# Altium PCB optopara_rro.PcbDoc
Units mm, origin at the board's own origin, x right, y up, seen from the top; angles counter-clockwise.
Board outline 71.5 x 27.85 mm, 2 copper layers (Top Layer, Bottom Layer); 50 components, 26 nets, 92 pads, 0 vias.
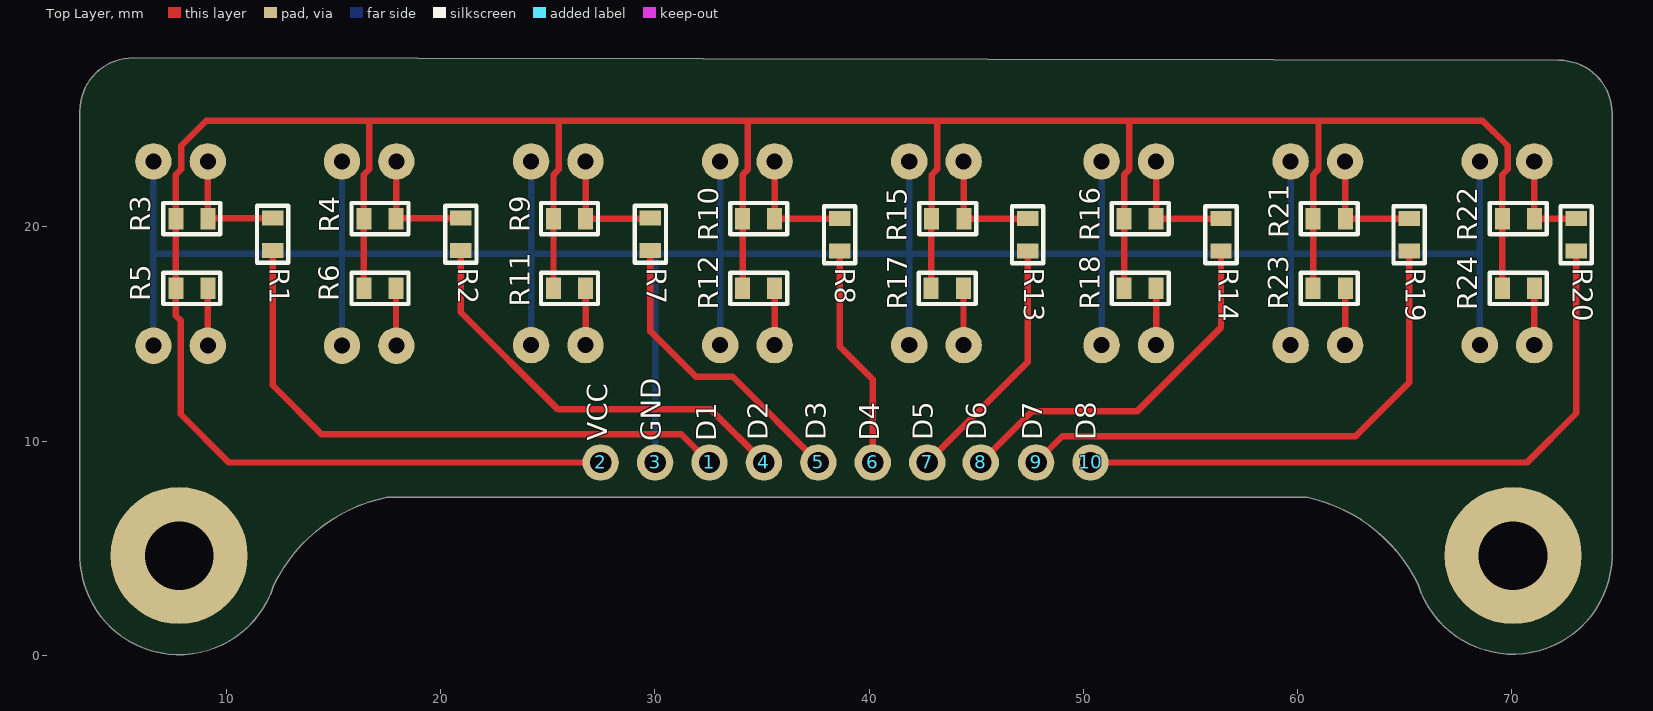
[diagram p0: Top Layer view]
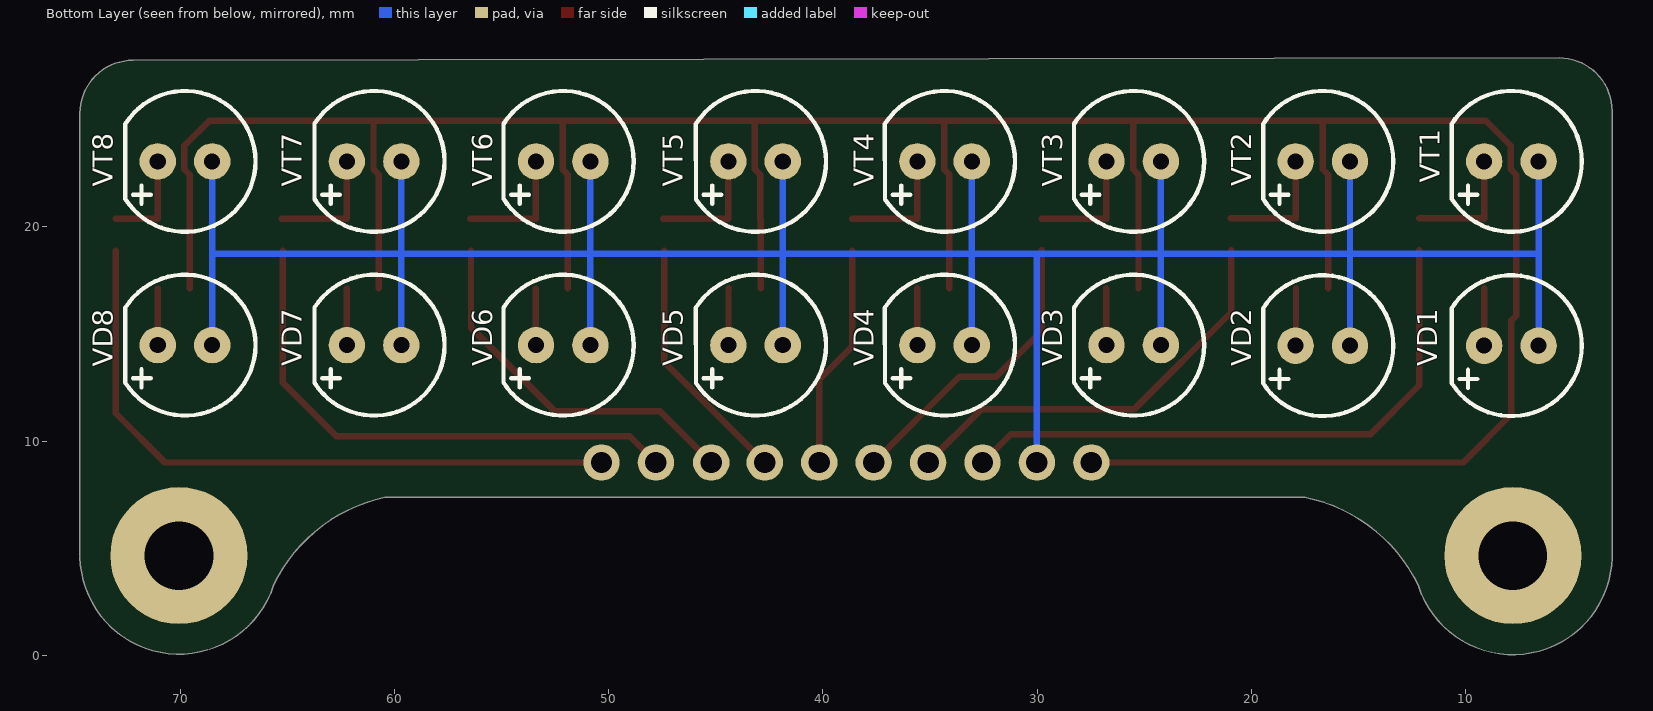
[diagram p1: Bottom Layer view, seen from below]
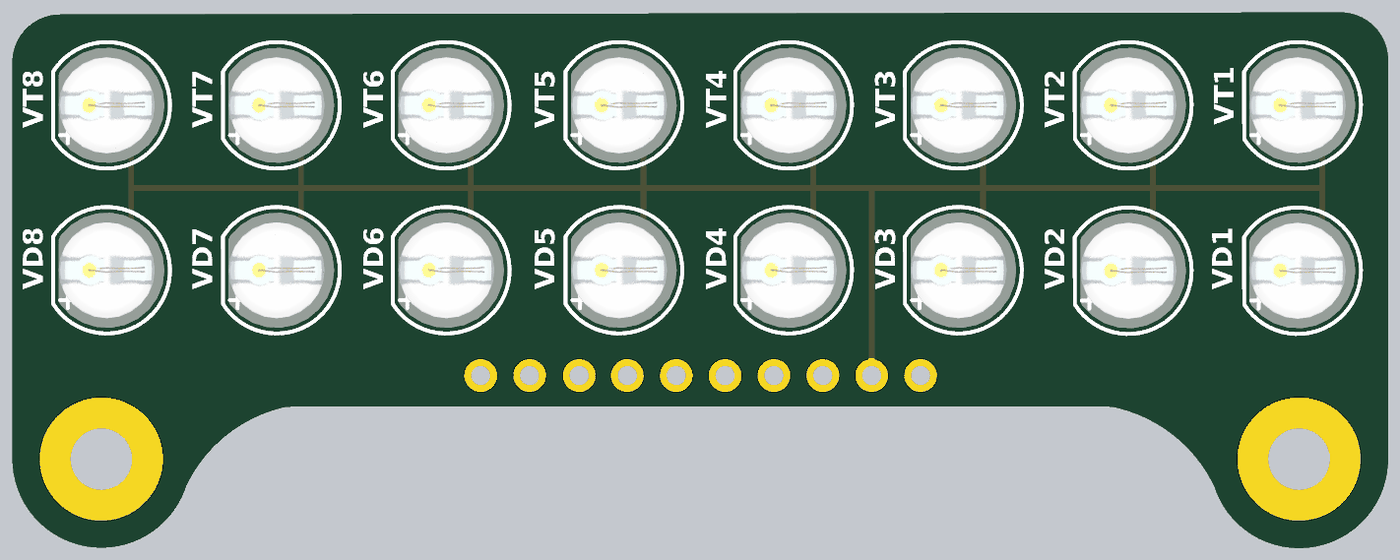
[diagram p2: 3D render of the assembled board from below, using the file's embedded part models]

## Layer stack, top to bottom
Top Solder: solder mask 0.0102, Solder Resist, Dk 3.5
Top Layer: signal copper 0.0356
Dielectric 1: dielectric 0.32, FR-4, Dk 4.8
Bottom Layer: signal copper 0.0356
Bottom Solder: solder mask 0.0102, Solder Resist, Dk 3.5

## Board outline
3.181,4.562 ccw(c7.805,4.655) 12.201,3.217 12.204,3.227 cw(c19,0) 17.512,7.375 60.425,7.375 60.447,7.377 cw(c58.85,0.025) 65.646,3.252 65.649,3.242 ccw(c70.045,4.68) 74.669,4.587 74.675,4.625 74.675,25.285 ccw(c72.187,25.282) 72.186,27.771 5.654,27.881 5.653,27.881 ccw(c5.656,25.4) 3.175,25.399

## Design rules (kind name [scope] priority, off if disabled: settings)
AcuteAngle min_acute_angle [OnCopper] p1: minimum=3.50000000000000E+0001 checktracksonly=FALSE // Минимальный угол между примитивами топологии
BoardOutlineClearance board_outline_clearance_std [NOT (OnLayer('Bottom Overlay') OR OnLayer('Top Overlay'))] p1: gap=0.25 ignorepadtopadclearanceinfootprint=FALSE except(0: Arc-SplitContinuation Track-SplitContinuation SMDPad-SplitContinuation THPad-SplitContinuation Via-SplitContinuation Fill-SplitContinuation Poly-SplitContinuation Region-SplitContinuation Text-SplitContinuation) // Отступ элементов топологии от края фрезеруемой печатной платы
Clearance clearance_outer_35um_std [OnTopLayer OR OnBottomLayer] p1: gap=0.2 ignorepadtopadclearanceinfootprint=TRUE except(0.25: Arc-Hole Track-Hole SMDPad-Hole THPad-Hole Via-Hole Fill-Hole Poly-Hole Region-Hole Text-Hole) // Зазоры на внешних слоях
Clearance clearance_inner_35um_std [NOT (OnTopLayer Or OnBottomLayer)] p2: gap=0.2 ignorepadtopadclearanceinfootprint=FALSE except(0.25: Arc-Hole Track-Hole SMDPad-Hole THPad-Hole Via-Hole Fill-Hole Poly-Hole Region-Hole Text-Hole) // Зазоры на внутренних слоях
ComponentClearance [All] p1: gap=0 collisioncheckmode=3 verticalgap=0 showdistances=FALSE
DiffPairsRouting diff_pairs_routing [All] p1: maxlimit=0.127 minlimit=0.127 mostfreqgap=0.127 toplayer_minwidth=0.143 toplayer_maxwidth=0.143 toplayer_prefwidth=0.143 bottomlayer_minwidth=0.143 bottomlayer_maxwidth=0.143 bottomlayer_prefwidth=0.143 impedanceprofiledriven=TRUE impedanceprofileid={FD46899E-B5A2-4EF5-A302-5D2DB6A51F35} maxuncoupledlength=12.7 // Правила трассировки дифференциальных пар
HoleSize min_hole_size_std [IsPad] p1: absolutevalues=TRUE maxlimit=5.9 minlimit=0.6 maxpercent=80.000 minpercent=20.000 // Диаметр межслойного переходного отверстия
HoleSize min_hole_size_via_std [IsVia] p2: absolutevalues=TRUE maxlimit=5.9 minlimit=0.3 maxpercent=80.000 minpercent=20.000 // Минимальный диаметр монтажного отверстия
HoleToHoleClearance hole_to_hole_clearance_std [All] p1: gap=0.2 allowstackedmicrovias=FALSE // Минимальное расстояние между краями двух отверстий
MinimumAnnularRing min_via_ar_std [All] p1: minimumring=0.15 // Поясок площадки переходного отверстия (Annular ring VIA)
MinimumAnnularRing min_pad_ar_std [All] p2: minimumring=0.2 // Поясок монтажной контактной площадки (Annular ring PAD)
MinimumSolderMaskSliver min_solder_mask_bridge_std [All] p1: minsoldermaskwidth=0.15 // Мнимальная ширина масочного мостика
PlaneClearance plane_clearance_35um_std [All] p1: clearance=0.2 // Отступ полигона (для слоя plane) от элементов топологии
PlaneConnect [All] p1: planeconnectstyle=Relief reliefexpansion=0.5 reliefentries=4 reliefconductorwidth=0.2 reliefairgap=0.2
PolygonConnect poly_connect_to_pad<=0.3 [(AsMM(PadXSize_AllLayers)<=0.301) or (AsMM(PadYSize_AllLayers)<=0.301)] p1: thpad.connectstyle=Relief thpad.reliefconductorwidth=0.2 thpad.reliefentries=4 thpad.polygonreliefangle="90 Angle" thpad.airgapwidth=0.2 smdpad.connectstyle=Relief smdpad.reliefconductorwidth=0.2 smdpad.reliefentries=4 smdpad.polygonreliefangle="90 Angle" smdpad.airgapwidth=0.2 via.connectstyle=Direct via.reliefconductorwidth=0.254 via.reliefentries=4 via.polygonreliefangle="90 Angle" via.airgapwidth=0.254 // Правила подключения полигонов для падов от 0,3мм и меньше
PolygonConnect poly_connect_to_pad<=0.4 [(AsMM(PadXSize_AllLayers)<=0.401) or (AsMM(PadYSize_AllLayers)<=0.401)] p2: thpad.connectstyle=Relief thpad.reliefconductorwidth=0.26 thpad.reliefentries=4 thpad.polygonreliefangle="90 Angle" thpad.airgapwidth=0.2 smdpad.connectstyle=Relief smdpad.reliefconductorwidth=0.26 smdpad.reliefentries=4 smdpad.polygonreliefangle="90 Angle" smdpad.airgapwidth=0.2 via.connectstyle=Direct via.reliefconductorwidth=0.254 via.reliefentries=4 via.polygonreliefangle="90 Angle" via.airgapwidth=0.254 // Правила подключения полигонов для падов от 0,4 и меньше
PolygonConnect poly_connect_to_pad<=0.6 [(AsMM(PadXSize_AllLayers)<=0.601) or (AsMM(PadYSize_AllLayers)<=0.601)] p3: thpad.connectstyle=Relief thpad.reliefconductorwidth=0.33 thpad.reliefentries=4 thpad.polygonreliefangle="90 Angle" thpad.airgapwidth=0.2 smdpad.connectstyle=Relief smdpad.reliefconductorwidth=0.33 smdpad.reliefentries=4 smdpad.polygonreliefangle="90 Angle" smdpad.airgapwidth=0.2 via.connectstyle=Direct via.reliefconductorwidth=0.254 via.reliefentries=4 via.polygonreliefangle="90 Angle" via.airgapwidth=0.254 // Правила подключения полигонов для падов от 0,6мм и меньше
PolygonConnect poly_connect_to_pad<=0.7 [(AsMM(PadXSize_AllLayers)<=0.701) or (AsMM(PadYSize_AllLayers)<=0.701)] p4: thpad.connectstyle=Relief thpad.reliefconductorwidth=0.46 thpad.reliefentries=4 thpad.polygonreliefangle="90 Angle" thpad.airgapwidth=0.2 smdpad.connectstyle=Relief smdpad.reliefconductorwidth=0.46 smdpad.reliefentries=4 smdpad.polygonreliefangle="90 Angle" smdpad.airgapwidth=0.2 via.connectstyle=Direct via.reliefconductorwidth=0.254 via.reliefentries=4 via.polygonreliefangle="90 Angle" via.airgapwidth=0.254 // Правила подключения полигонов для падов от 0,7мм и меньше
PolygonConnect poly_connect_to_pad<=0.8 [(AsMM(PadXSize_AllLayers)<=0.8)or(AsMM(PadYSize_AllLayers)<=0.8)] p5: thpad.connectstyle=Relief thpad.reliefconductorwidth=0.53 thpad.reliefentries=4 thpad.polygonreliefangle="90 Angle" thpad.airgapwidth=0.3 smdpad.connectstyle=Relief smdpad.reliefconductorwidth=0.53 smdpad.reliefentries=4 smdpad.polygonreliefangle="90 Angle" smdpad.airgapwidth=0.2 via.connectstyle=Direct via.reliefconductorwidth=0.254 via.reliefentries=4 via.polygonreliefangle="90 Angle" via.airgapwidth=0.254 // Правила подключения полигонов для падов от 0,8мм и меньше
PolygonConnect poly_connect_to_pad<=1 [(AsMM(PadXSize_AllLayers)<=1.01)or(AsMM(PadYSize_AllLayers)<=1.01)] p6: thpad.connectstyle=Relief thpad.reliefconductorwidth=0.6 thpad.reliefentries=4 thpad.polygonreliefangle="90 Angle" thpad.airgapwidth=0.3 smdpad.connectstyle=Relief smdpad.reliefconductorwidth=0.6 smdpad.reliefentries=4 smdpad.polygonreliefangle="90 Angle" smdpad.airgapwidth=0.2 via.connectstyle=Direct via.reliefconductorwidth=0.254 via.reliefentries=4 via.polygonreliefangle="90 Angle" via.airgapwidth=0.254 // Правила подключения полигонов для падов от 1мм и меньше
PolygonConnect poly_connect_to_pad<=1.3 [(AsMM(PadXSize_AllLayers)<=1.31)or(AsMM(PadYSize_AllLayers)<=1.31)] p7: thpad.connectstyle=Relief thpad.reliefconductorwidth=0.66 thpad.reliefentries=4 thpad.polygonreliefangle="90 Angle" thpad.airgapwidth=0.3 smdpad.connectstyle=Relief smdpad.reliefconductorwidth=0.86 smdpad.reliefentries=4 smdpad.polygonreliefangle="90 Angle" smdpad.airgapwidth=0.2 via.connectstyle=Direct via.reliefconductorwidth=0.254 via.reliefentries=4 via.polygonreliefangle="90 Angle" via.airgapwidth=0.254 // Правила подключения полигонов для падов от 1,3мм и меньше
PolygonConnect poly_connect_to_pad<=1.6 [(AsMM(PadXSize_AllLayers)<=1.61)or(AsMM(PadYSize_AllLayers)<=1.61)] p8: thpad.connectstyle=Relief thpad.reliefconductorwidth=0.8 thpad.reliefentries=4 thpad.polygonreliefangle="90 Angle" thpad.airgapwidth=0.3 smdpad.connectstyle=Relief smdpad.reliefconductorwidth=1 smdpad.reliefentries=4 smdpad.polygonreliefangle="90 Angle" smdpad.airgapwidth=0.2 via.connectstyle=Direct via.reliefconductorwidth=0.254 via.reliefentries=4 via.polygonreliefangle="90 Angle" via.airgapwidth=0.254 // Правила подключения полигонов для падов от 1,6мм и меньше
PolygonConnect poly_connect_to_pad<=1.8 [(AsMM(PadXSize_AllLayers)<=1.8)or(AsMM(PadYSize_AllLayers)<=1.8)] p9: thpad.connectstyle=Relief thpad.reliefconductorwidth=1 thpad.reliefentries=4 thpad.polygonreliefangle="90 Angle" thpad.airgapwidth=0.3 smdpad.connectstyle=Relief smdpad.reliefconductorwidth=1.2 smdpad.reliefentries=4 smdpad.polygonreliefangle="90 Angle" smdpad.airgapwidth=0.2 via.connectstyle=Direct via.reliefconductorwidth=0.254 via.reliefentries=4 via.polygonreliefangle="90 Angle" via.airgapwidth=0.254 // Правила подключения полигонов для падов от 1,8мм и меньше
PolygonConnect poly_connect_to_pad<=2 [(AsMM(PadXSize_AllLayers)<=2.01)or(AsMM(PadYSize_AllLayers)<=2.01)] p10: thpad.connectstyle=Relief thpad.reliefconductorwidth=1.1 thpad.reliefentries=4 thpad.polygonreliefangle="90 Angle" thpad.airgapwidth=0.3 smdpad.connectstyle=Relief smdpad.reliefconductorwidth=1.4 smdpad.reliefentries=4 smdpad.polygonreliefangle="90 Angle" smdpad.airgapwidth=0.2 via.connectstyle=Direct via.reliefconductorwidth=0.254 via.reliefentries=4 via.polygonreliefangle="90 Angle" via.airgapwidth=0.254 // Правила подключения полигонов для падов от 2мм и меньше
PolygonConnect poly_connect_to_pad<=2.3 [(AsMM(PadXSize_AllLayers)<=2.31)or(AsMM(PadYSize_AllLayers)<=2.31)] p11: thpad.connectstyle=Relief thpad.reliefconductorwidth=1.2 thpad.reliefentries=4 thpad.polygonreliefangle="90 Angle" thpad.airgapwidth=0.3 smdpad.connectstyle=Relief smdpad.reliefconductorwidth=1.4 smdpad.reliefentries=4 smdpad.polygonreliefangle="90 Angle" smdpad.airgapwidth=0.2 via.connectstyle=Direct via.reliefconductorwidth=0.254 via.reliefentries=4 via.polygonreliefangle="90 Angle" via.airgapwidth=0.254 // Правила подключения полигонов для падов от 2,3мм и меньше
PolygonConnect poly_connect_to_pad<=2.5 [(AsMM(PadXSize_AllLayers)<=2.51)or(AsMM(PadYSize_AllLayers)<=2.51)] p12: thpad.connectstyle=Relief thpad.reliefconductorwidth=1.2 thpad.reliefentries=4 thpad.polygonreliefangle="90 Angle" thpad.airgapwidth=0.3 smdpad.connectstyle=Relief smdpad.reliefconductorwidth=1.4 smdpad.reliefentries=4 smdpad.polygonreliefangle="90 Angle" smdpad.airgapwidth=0.2 via.connectstyle=Direct via.reliefconductorwidth=0.254 via.reliefentries=4 via.polygonreliefangle="90 Angle" via.airgapwidth=0.254 // Правила подключения полигонов для падов от 2,5мм и меньше
PolygonConnect poly_connect_to_pad<=2.7 [(AsMM(PadXSize_AllLayers)<=2.71)or(AsMM(PadYSize_AllLayers)<=2.71)] p13: thpad.connectstyle=Relief thpad.reliefconductorwidth=1.4 thpad.reliefentries=4 thpad.polygonreliefangle="90 Angle" thpad.airgapwidth=0.3 smdpad.connectstyle=Relief smdpad.reliefconductorwidth=1.6 smdpad.reliefentries=4 smdpad.polygonreliefangle="90 Angle" smdpad.airgapwidth=0.2 via.connectstyle=Direct via.reliefconductorwidth=0.254 via.reliefentries=4 via.polygonreliefangle="90 Angle" via.airgapwidth=0.254 // Правила подключения полигонов для падов от 2,7мм и меньше
PolygonConnect poly_connect_to_pad<=3 [(AsMM(PadXSize_AllLayers)<=3.01)or(AsMM(PadYSize_AllLayers)<=3.01)] p14: thpad.connectstyle=Relief thpad.reliefconductorwidth=1.6 thpad.reliefentries=4 thpad.polygonreliefangle="90 Angle" thpad.airgapwidth=0.3 smdpad.connectstyle=Relief smdpad.reliefconductorwidth=1.8 smdpad.reliefentries=4 smdpad.polygonreliefangle="90 Angle" smdpad.airgapwidth=0.2 via.connectstyle=Direct via.reliefconductorwidth=0.254 via.reliefentries=4 via.polygonreliefangle="90 Angle" via.airgapwidth=0.254 // Правила подключения полигонов для падов от 3мм и меньше
PolygonConnect poly_connect_to_pad<=7 [(AsMM(PadXSize_AllLayers)<7.01)or(AsMM(PadYSize_AllLayers)<=7.01)] p15: thpad.connectstyle=Relief thpad.reliefconductorwidth=2 thpad.reliefentries=4 thpad.polygonreliefangle="90 Angle" thpad.airgapwidth=0.4 smdpad.connectstyle=Relief smdpad.reliefconductorwidth=2 smdpad.reliefentries=4 smdpad.polygonreliefangle="90 Angle" smdpad.airgapwidth=0.3 via.connectstyle=Direct via.reliefconductorwidth=0.254 via.reliefentries=4 via.polygonreliefangle="90 Angle" via.airgapwidth=0.254 // Правила подключения полигонов для падов от 7мм и меньше
PolygonConnect poly_connect_to_pad [All] p16: thpad.connectstyle=Relief thpad.reliefconductorwidth=0.25 thpad.reliefentries=4 thpad.polygonreliefangle="90 Angle" thpad.airgapwidth=0.2 smdpad.connectstyle=Relief smdpad.reliefconductorwidth=0.25 smdpad.reliefentries=4 smdpad.polygonreliefangle="90 Angle" smdpad.airgapwidth=0.2 via.connectstyle=Direct via.reliefconductorwidth=0.25 via.reliefentries=4 via.polygonreliefangle="90 Angle" via.airgapwidth=0.2 // Правила подключения полигонов общие
RoutingCorners [All] p1 off: cornerstyle=45-Degree minsetback=2.5 maxsetback=2.5
RoutingVias [All] p1: holewidth=0.3 width=0.6 viastyle="Through Hole" minholewidth=0.3 minwidth=0.6 maxholewidth=5.9 maxwidth=6.4
SilkToSilkClearance silk_to_silk_clearance_std [All] p1 off: silktosilkclearance=0.15 // Отступ текста шелкографии от других примитивов шелкографии
SilkToSolderMaskClearance silk_to_solder_mask_clearance_std [IsPad] p1 off: minsilkscreentomaskgap=0.15 clearancetoexposedcopper=FALSE // Минимальное расстояние между элементами шелкографии и вскрытой медью
SolderMaskExpansion solder_mask_expansion_std [All] p1: expansion=0.05 istentingtop=FALSE // Припуск паяльной масски
UnRoutedNet [All] p1: checkbadconnections=TRUE
Width width_35um_std [All] p1: maxlimit=10 minlimit=0.2 preferedwidth=0.2 checkconnectedcopper=TRUE // Ширина проводников (общая)
19 further rules are at their usual default settings.

## Components (designator, comment, footprint, x,y, rotation, side; value= is the part's Value field where it differs from the comment)
1 "MNT_HOLE" TP_1X1 32.555,9 r90 top
2 "MNT_HOLE" TP_1X1 27.475,9 r90 top
3 "MNT_HOLE" TP_1X1 30.015,9 r90 top
4 "MNT_HOLE" TP_1X1 35.095,9 r90 top
5 "MNT_HOLE" TP_1X1 37.635,9 r90 top
6 "MNT_HOLE" TP_1X1 40.175,9 r90 top
7 "MNT_HOLE" TP_1X1 42.715,9 r90 top
8 "MNT_HOLE" TP_1X1 45.212,9 r90 top
9 "MNT_HOLE" TP_1X1 47.795,9 r90 top
10 "MNT_HOLE" TP_1X1 50.335,9 r90 top
R1 "100" R0603 12.175,19.65 r90 top
R2 "100" R0603 20.95,19.652 r90 top
R3 "10к" R0603 8.4,20.375 r180 top
R4 "10к" R0603 17.175,20.375 r180 top
R5 "510" R0603 8.4,17.125 r180 top
R6 "510" R0603 17.175,17.125 r180 top
R7 "100" R0603 29.8,19.652 r90 top
R8 "100" R0603 38.625,19.627 r90 top
R9 "10к" R0603 26.025,20.375 r180 top
R10 "10к" R0603 34.85,20.375 r180 top
R11 "510" R0603 26.025,17.125 r180 top
R12 "510" R0603 34.85,17.125 r180 top
R13 "100" R0603 47.4,19.627 r90 top
R14 "100" R0603 56.425,19.627 r90 top
R15 "10к" R0603 43.675,20.375 r180 top
R16 "10к" R0603 52.65,20.375 r180 top
R17 "510" R0603 43.65,17.125 r180 top
R18 "510" R0603 52.65,17.125 r180 top
R19 "100" R0603 65.2,19.627 r90 top
R20 "100" R0603 73,19.625 r90 top
R21 "10к" R0603 61.475,20.375 r180 top
R22 "10к" R0603 70.3,20.375 r180 top
R23 "510" R0603 61.475,17.125 r180 top
R24 "510" R0603 70.3,17.125 r180 top
VD1 "" LED_5mm 7.875,14.45 r0 bottom
VD2 "" LED_5mm 16.675,14.45 r0 bottom
VD3 "" LED_5mm 25.5,14.475 r0 bottom
VD4 "" LED_5mm 34.325,14.475 r0 bottom
VD5 "" LED_5mm 43.145,14.475 r0 bottom
VD6 "" LED_5mm 52.12,14.475 r0 bottom
VD7 "" LED_5mm 60.945,14.475 r0 bottom
VD8 "" LED_5mm 69.77,14.475 r0 bottom
VT1 "-" LED_5mm 7.875,23.05 r0 bottom
VT2 "-" LED_5mm 16.675,23.05 r0 bottom
VT3 "-" LED_5mm 25.5,23.05 r0 bottom
VT4 "-" LED_5mm 34.325,23.05 r0 bottom
VT5 "-" LED_5mm 43.145,23.05 r0 bottom
VT6 "-" LED_5mm 52.12,23.05 r0 bottom
VT7 "-" LED_5mm 60.945,23.05 r0 bottom
VT8 "-" LED_5mm 69.77,23.05 r0 bottom

## Footprints (in the part's own frame and the unit in brackets; to place one, negate y for a bottom-side part, rotate by r counter-clockwise, add the part's x,y. Pads: shape width x height; smd on the part's side, far side on the other; paste and mask are expansions set on the pad)
LED_5mm [mm]
  round 1.7 hole 0.75: 1(1.27,0) 2(-1.27,0)
  silkscreen extent -3.29,-3.29 2.79,3.29, body extent -3,-3 2.5,3, height 8.6
R0603 [mm]
  rect 0.7x1 smd: 1(-0.75,0) 2(0.75,0)
  silkscreen extent -1.33,-0.73 1.33,0.73, body extent -0.8,-0.43 0.8,0.43, height 0.45
TP_1X1 [mm]
  round 1.7 hole 1: 1(0,0)

## Part data
R1 R2 R7 R8 R13 R14 R19 R20: library part RC0603FR-07100RL, "Резистор 100 Ом 0,1Вт 1%", Manufacturer=YAGEO, Tolerance=1%, Name=RC0603FR-07100RL
R3 R4 R9 R10 R15 R16 R21 R22: library part RC0603FR-0710KL, "Резистор 10кОм 0,063Вт 1%", Manufacturer=YAGEO, Tolerance=1%, Name=RC0603FR-0710KL
R5 R6 R11 R12 R17 R18 R23 R24: library part RC0603FR-07510RL, "Резистор 510 Ом 0,1Вт 1%", Manufacturer=YAGEO, Tolerance=1%, Name=RC0603FR-07510RL
VD1 VD2 VD3 VD4 VD5 VD6 VD7 VD8: library part IR_LED, "ИК светодиод"
VT1 VT2 VT3 VT4 VT5 VT6 VT7 VT8: library part BJTfoto, "Биполярный NPN транзистор", Manufacturer=-, Name=-, TU=-

## Free pads (board coordinates)
  round 6.4 hole 3.2: 6(7.805,4.655) 6(70.05,4.655)

## Nets (pads, with @x,y where several pads share a name; then routed paths per layer and width w, separated by ;. In a path a pad name is that pad's centre, name@x,y a point inside that pad or via, vN(x,y) a via of type N, cw(c..) or ccw(c..) an arc to the next point about the centre after c; other vN are vias at no path point)
+5В: 2.1 R3.2 R4.2 R5.2 R6.2 R9.2 R10.2 R11.2 R12.2 R15.2 R16.2 R17.2 R18.2 R21.2 R22.2 R23.2 R24.2 | length 176.3
  Top Layer w0.254: R17.2 R17.2@42.913,17.137 ; R15.2@42.913,20.362 R15.2
  Top Layer w0.3: R6.2 R4.2 16.425,22.046 16.425,22.418 16.516,22.513 16.675,22.678 16.675,24.875 ; R11.2 R9.2 25.275,22.046 25.275,22.418 25.366,22.513 25.525,22.678 25.525,24.875 ; 25.45,24.95 16.675,24.95 ; 2.1 10.125,9 7.875,11.25 7.875,15.625 7.65,15.85 R5.2 R3.2 7.65,22.046 7.65,22.418 7.741,22.513 7.9,22.678 7.9,23.775 9.075,24.95 16.675,24.95 ; R12.2 R10.2 34.1,22.046 34.1,22.418 34.191,22.513 34.35,22.678 34.35,24.875 ; 34.275,24.95 25.525,24.95 ; R17.2@42.913,17.137 R15.2@42.913,20.362 ; R15.2 42.925,22.046 42.925,22.418 43.016,22.513 43.175,22.678 43.175,24.875 ; 43.1,24.95 34.35,24.95 ; R18.2 R16.2 51.9,22.046 51.9,22.418 51.991,22.513 52.15,22.678 52.15,24.875 ; R23.2 R21.2 60.725,22.046 60.725,22.418 60.816,22.513 60.975,22.678 60.975,24.875 ; 60.906,24.944 60.9,24.95 ; R24.2 69.55,22.046 69.55,22.418 69.641,22.513 69.8,22.678 69.8,23.775 68.625,24.95 60.9,24.95 ; 16.675,24.95 25.525,24.95 ; 25.525,24.95 34.35,24.95 ; 34.35,24.95 60.9,24.95
GND: 3.1 VD1.2 VD2.2 VD3.2 VD4.2 VD5.2 VD6.2 VD7.2 VD8.2 VT1.2 VT2.2 VT3.2 VT4.2 VT5.2 VT6.2 VT7.2 VT8.2 | length 140.4
  Bottom Layer w0.3: VD1.2 6.605,18.75 ; VT1.2 6.605,18.75 ; VD2.2 15.405,18.75 ; VT2.2 15.405,18.75 ; VD3.2 24.23,18.762 ; VT3.2 24.23,18.762 ; 3.1 30.015,18.75 ; VD4.2 33.055,18.762 ; VT4.2 33.055,18.762 ; VD5.2 41.875,18.762 ; VT5.2 41.875,18.762 ; VD6.2 50.85,18.762 ; VT6.2 50.85,18.762 ; VD7.2 59.675,18.762 ; VT7.2 59.675,18.762 ; VD8.2 68.5,18.762 ; VT8.2 68.5,18.762 ; 6.605,18.75 15.405,18.75 ; 15.405,18.75 24.218,18.75 ; 24.218,18.75 24.23,18.762 ; 24.218,18.75 30.015,18.75 ; 30.015,18.75 33.043,18.75 ; 33.043,18.75 41.863,18.75 ; 33.043,18.75 33.055,18.762 ; 41.863,18.75 41.875,18.762 ; 41.863,18.75 50.838,18.75 ; 50.838,18.75 50.85,18.762 ; 50.838,18.75 59.663,18.75 ; 59.663,18.75 68.488,18.75 68.5,18.762 ; 59.663,18.75 59.675,18.762
Net1_1: 1.1 R1.1 | length 28.2
  Top Layer w0.3: R1.1 12.175,12.6 14.45,10.325 31.23,10.325 1.1
Net4_1: 4.1 R2.1 | length 19.9
  Top Layer w0.3: R2.1 20.95,16.014 25.489,11.475 32.62,11.475 4.1
Net5_1: 5.1 R7.1 | length 14.1
  Top Layer w0.3: R7.1 29.8,15.125 31.925,13 33.635,13 5.1
Net6_1: 6.1 R8.1 | length 10.5
  Top Layer w0.3: R8.1 38.625,14.425 40.175,12.875 6.1
Net7_1: 7.1 R13.1 | length 11.8
  Top Layer w0.3: 7.1 47.4,13.685 R13.1
Net8_1: 8.1 R14.1 | length 17.4
  Top Layer w0.3: 8.1 47.612,11.4 52.525,11.4 56.425,15.3 R14.1
Net9_1: 9.1 R19.1 | length 25.1
  Top Layer w0.3: 9.1 49.02,10.225 62.7,10.225 65.2,12.725 R19.1
Net10_1: 10.1 R20.1 | length 31.2
  Top Layer w0.3: 10.1 70.7,9 73,11.3 R20.1
NetR1_2: R1.2 R3.1 VT1.1 | length 5.7
  Top Layer w0.3: VT1.1 9.148,23.048 9.148,20.377 R3.1 9.175,20.4 R1.2
NetR2_2: R2.2 R4.1 VT2.1 | length 5.7
  Top Layer w0.254: R4.1@17.935,20.385 R4.1 R4.1@17.95,20.4 ; VT2.1@17.935,23.04 VT2.1
  Top Layer w0.3: R4.1@17.935,20.385 VT2.1@17.935,23.04 ; R4.1@17.95,20.4 R2.2@20.975,20.4
NetR5_1: R5.1 VD1.1 | length 2.7
  Top Layer w0.254: VD1.1 VD1.1@9.148,14.452 ; R5.1@9.148,17.123 R5.1
  Top Layer w0.3: VD1.1@9.148,14.452 R5.1@9.148,17.123
NetR6_1: R6.1 VD2.1 | length 2.7
  Top Layer w0.254: VD2.1@17.925,14.47 VD2.1
  Top Layer w0.3: VD2.1@17.925,14.47 R6.1
NetR7_2: R7.2 R9.1 VT3.1 | length 5.7
  Top Layer w0.3: VT3.1 26.773,23.047 26.773,20.378 R9.1 R7.2@29.8,20.375
NetR8_2: R8.2 R10.1 VT4.1 | length 5.7
  Top Layer w0.3: VT4.1 35.598,23.048 35.598,20.378 R10.1 ; R10.1@35.602,20.377 R8.2
NetR11_1: R11.1 VD3.1 | length 2.7
  Top Layer w0.254: VD3.1 VD3.1@26.773,14.478 ; R11.1@26.773,17.123 R11.1
  Top Layer w0.3: VD3.1@26.773,14.478 R11.1@26.773,17.123
NetR12_1: R12.1 VD4.1 | length 2.7
  Top Layer w0.254: VD4.1 VD4.1@35.598,14.477 ; R12.1@35.598,17.123 R12.1
  Top Layer w0.3: VD4.1@35.598,14.477 R12.1@35.598,17.123
NetR13_2: R13.2 R15.1 VT5.1 | length 5.7
  Top Layer w0.3: VT5.1 44.42,23.045 44.42,20.38 R15.1 R13.2@47.45,20.375
NetR14_2: R14.2 R16.1 VT6.1 | length 5.7
  Top Layer w0.3: VT6.1 53.395,23.045 53.395,20.38 R16.1 R14.2@56.45,20.375
NetR17_1: R17.1 VD5.1 | length 2.7
  Top Layer w0.3: R17.1 44.408,17.117 44.408,14.483 VD5.1
NetR18_1: R18.1 VD6.1 | length 2.7
  Top Layer w0.254: VD6.1 VD6.1@53.395,14.48 ; R18.1@53.395,17.12 R18.1
  Top Layer w0.3: VD6.1@53.395,14.48 R18.1@53.395,17.12
NetR19_2: R19.2 R21.1 VT7.1 | length 5.7
  Top Layer w0.3: VT7.1 62.22,23.045 62.22,20.38 R21.1 R19.2@65.25,20.375
NetR20_2: R20.2 R22.1 VT8.1 | length 4.6
  Top Layer w0.254: VT8.1 VT8.1@71.045,23.045 ; R22.1@71.045,20.38 R22.1
  Top Layer w0.3: R22.1@71.045,20.38 VT8.1@71.045,23.045 ; R22.1 R20.2
NetR23_1: R23.1 VD7.1 | length 2.7
  Top Layer w0.254: VD7.1 VD7.1@62.22,14.48 ; R23.1@62.22,17.12 R23.1
  Top Layer w0.3: VD7.1@62.22,14.48 R23.1@62.22,17.12
NetR24_1: R24.1 VD8.1 | length 2.7
  Top Layer w0.254: VD8.1 VD8.1@71.045,14.48 ; R24.1@71.045,17.12 R24.1
  Top Layer w0.3: VD8.1@71.045,14.48 R24.1@71.045,17.12

## Silkscreen, mask and mechanical layers (free items; w line width, h text height)
Mechanical 1:
  lines w0.25: 3.3,4.6 3.3,25.399 cw(c5.656,25.4) 5.654,27.756 72.186,27.645 cw(c72.187,25.282) 74.55,25.284 74.55,4.625 ; 3.305,4.655 ccw(c7.805,4.655) 12.082,3.256 ; 12.081,3.26 cw(c19,0) 17.5,7.5 60.425,7.5 ; 60.466,7.501 cw(c58.85,0.025) 65.769,3.285 ; 65.768,3.281 ccw(c70.045,4.68) 74.545,4.68

## Text inside footprints (layer, text, board x,y; h text height)
1: Top Overlay "D1" at 33.2,10.003 h1.6 r90
2: Top Overlay "VCC" at 28.1,10.021 h1.6 r90
3: Top Overlay "GND" at 30.6,9.985 h1.6 r90
4: Top Overlay "D2" at 35.595,10.035 h1.6 r90
5: Top Overlay "D3" at 38.3,10.034 h1.6 r90
6: Top Overlay "D4" at 40.8,10.023 h1.6 r90
7: Top Overlay "D5" at 43.3,10.027 h1.6 r90
8: Top Overlay "D6" at 45.8,10.03 h1.6 r90
9: Top Overlay "D7" at 48.4,10.036 h1.6 r90
10: Top Overlay "D8" at 50.9,10.035 h1.6 r90